# Altium PCB PCB264.PcbDoc
Units mm, origin at the board's own origin, x right, y up, seen from the top; angles counter-clockwise.
Board outline 152.4 x 101.6 mm, 2 copper layers (Top Layer, Bottom Layer); 89 components, 89 nets, 425 pads, 53 vias.
Unrouted connection lines stored in the file: 221.
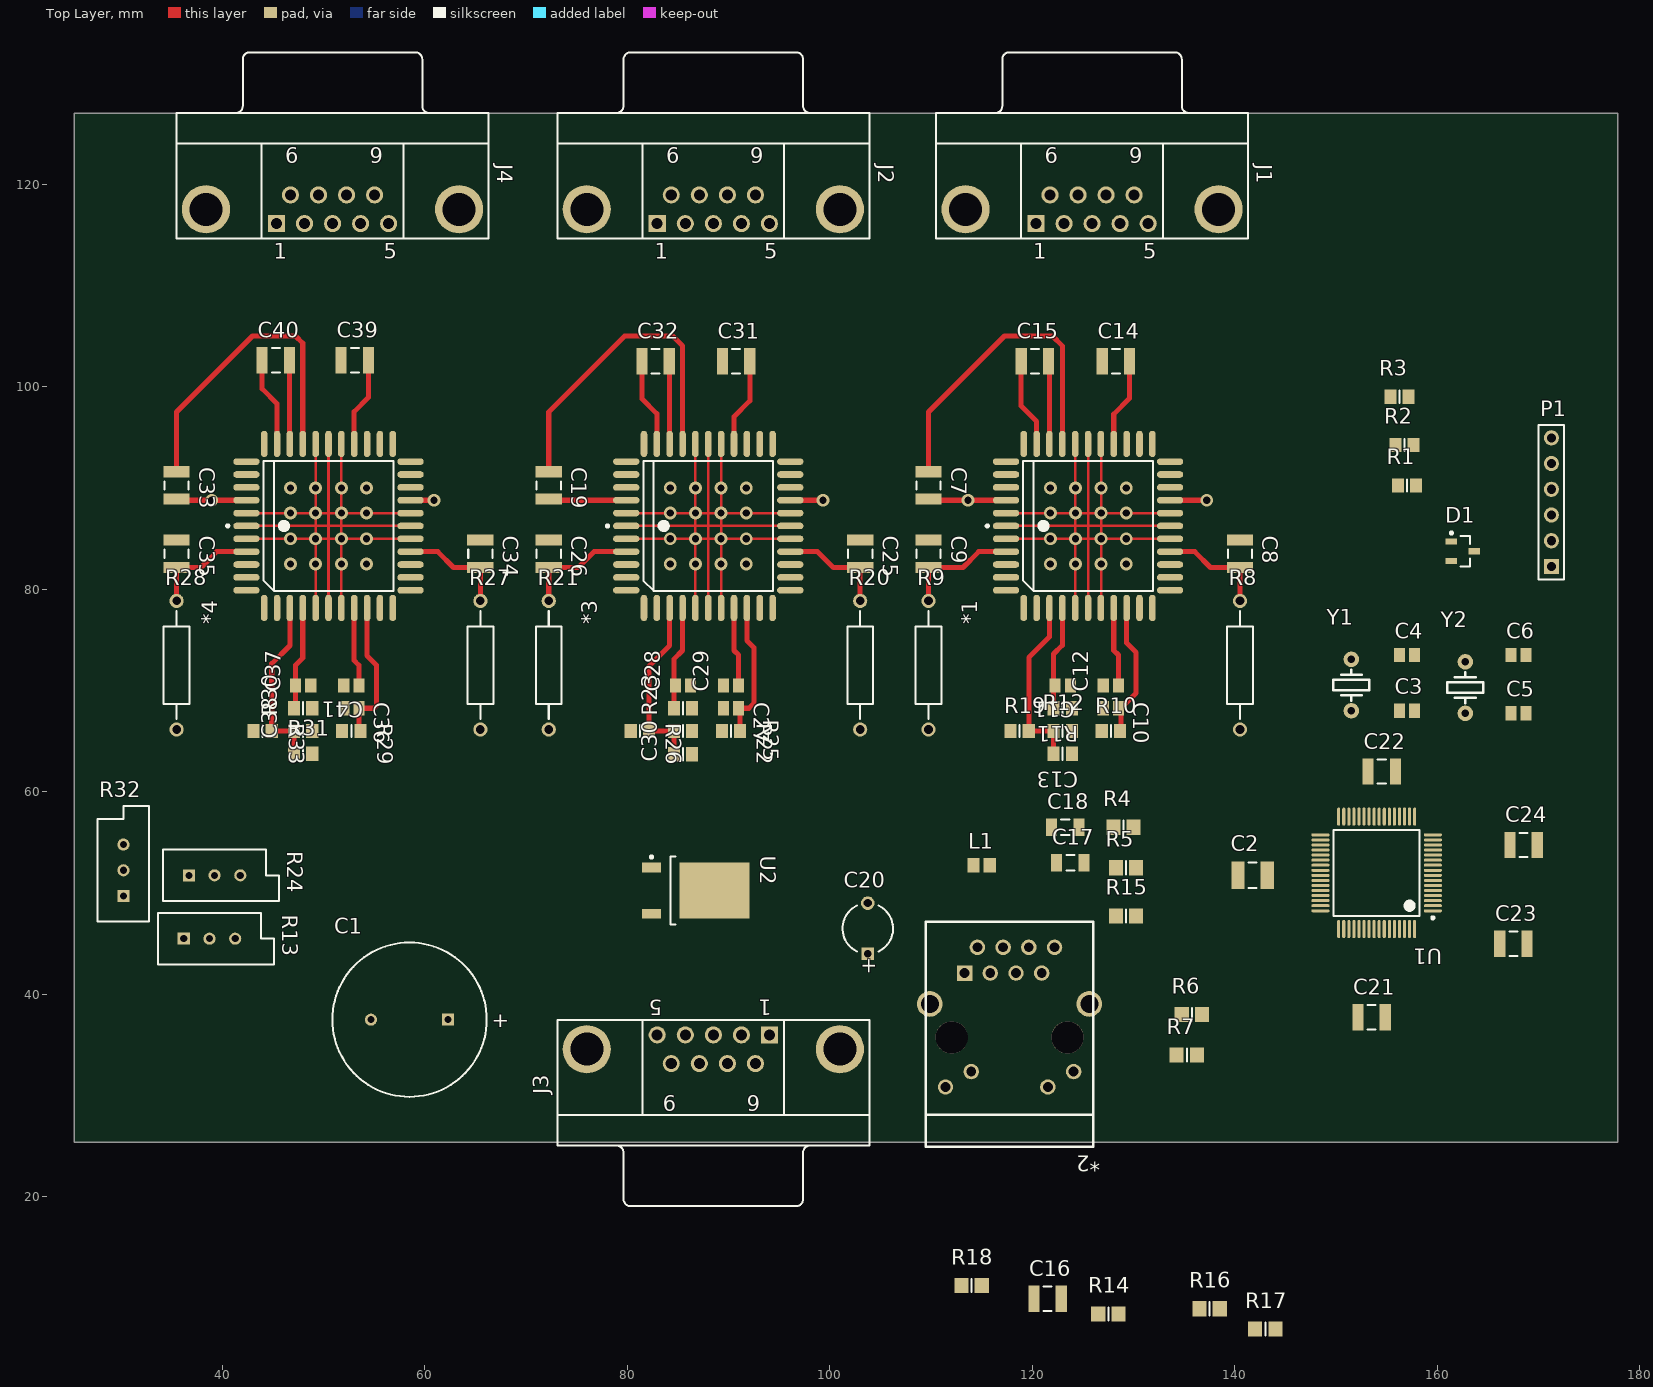
[diagram p0: Top Layer view]
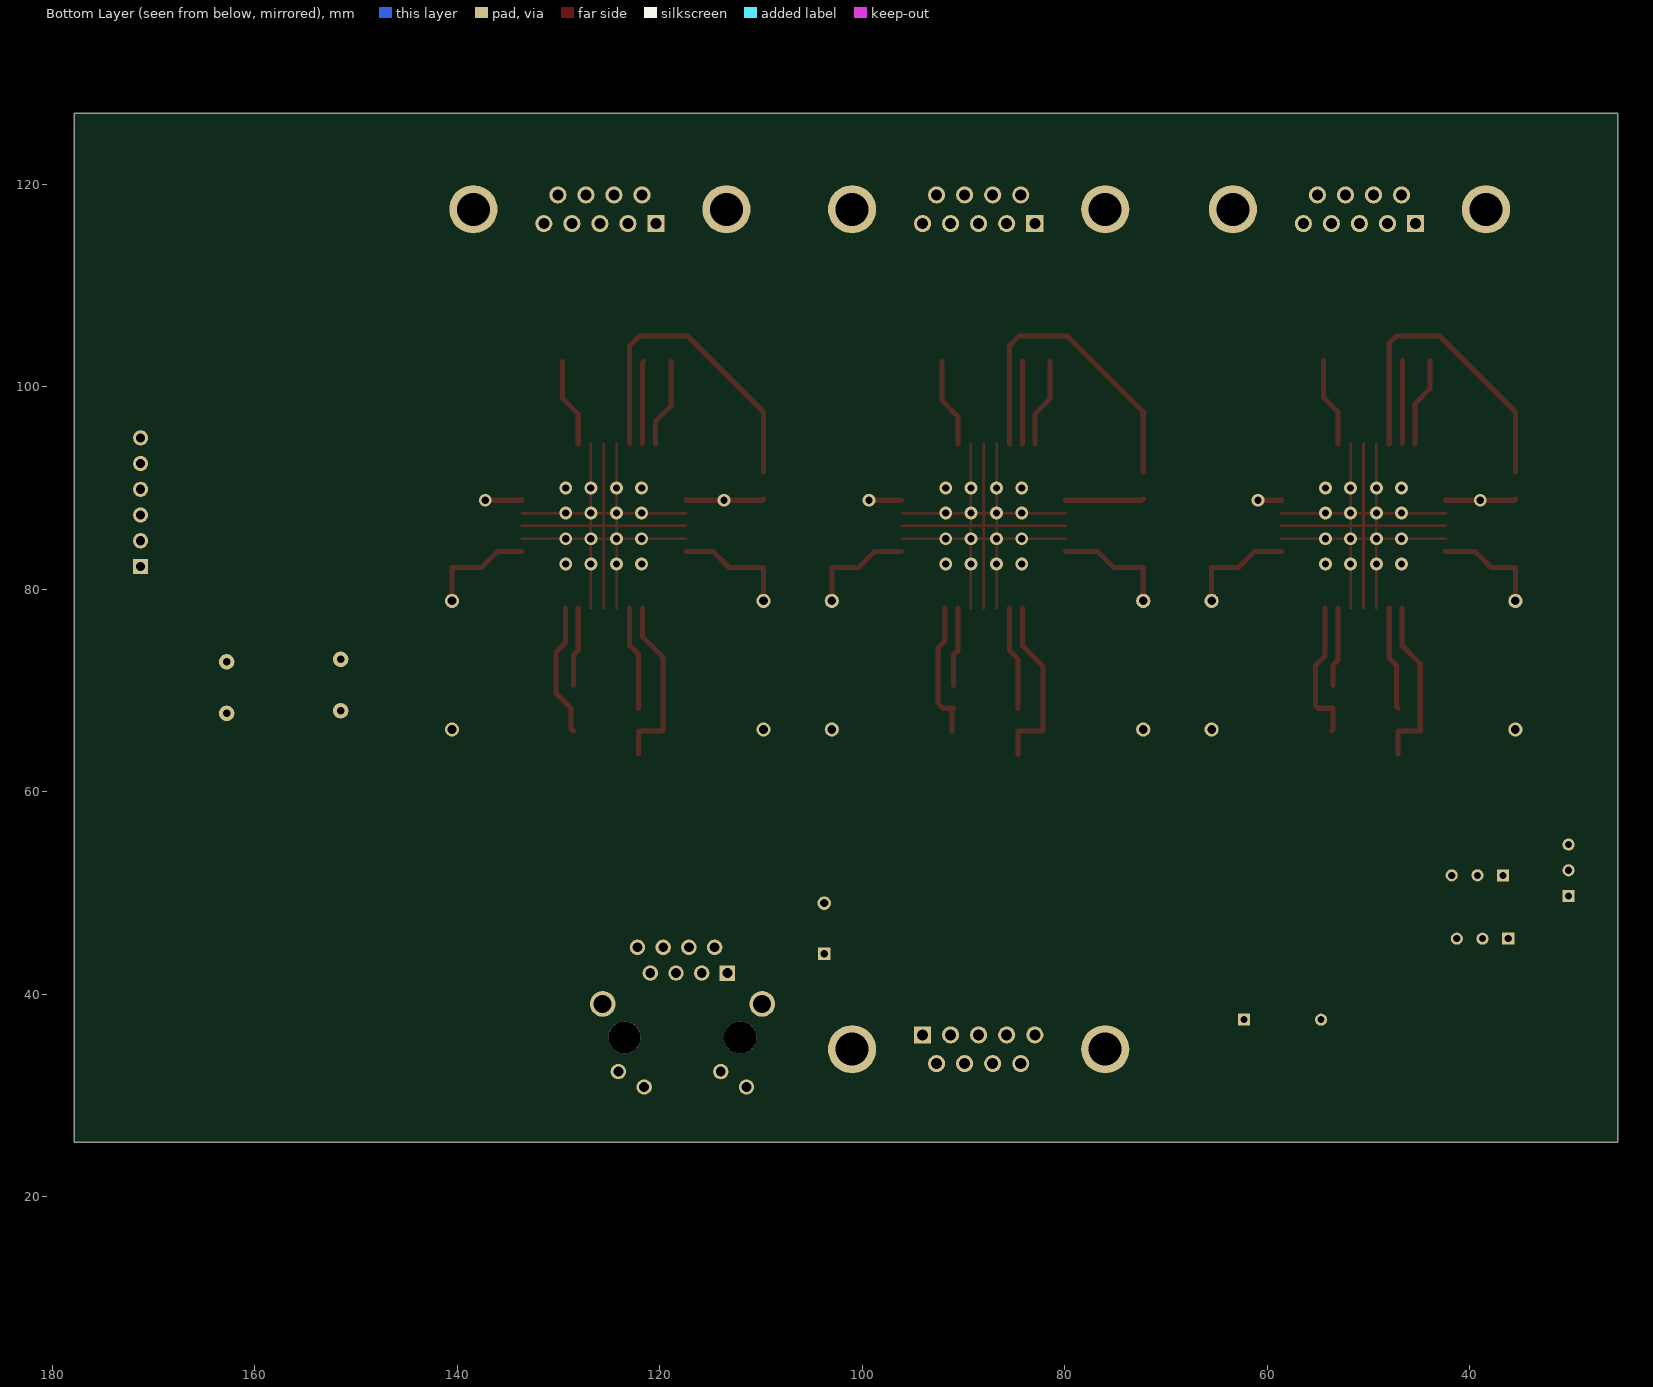
[diagram p1: Bottom Layer view, seen from below]

## Layer stack, top to bottom
Top Layer: signal copper 0.0356
Dielectric: dielectric 0.32, FR-4, Dk 4.8
Bottom Layer: signal copper 0.0356

## Board outline
25.4,25.4 177.8,25.4 177.8,127 25.4,127

## Design rules (kind name [scope] priority, off if disabled: settings)
Clearance [All] p1: gap=0.127
PolygonConnect [All] p1: connectstyle=Relief reliefconductorwidth=0.254 reliefentries=4 polygonreliefangle="90 Angle"
RoomDefinition Sheet1 [InComponentClass('Sheet1')] p1: confinementstyle=ConfineOut formatcopy=TRUE lockcomponents=FALSE outline 179,24.5 230,24.5 230,42 179,42
RoutingVias [All] p1: holewidth=0.711 width=1.27 viastyle="Through Hole" minholewidth=0.711 minwidth=1.27 maxholewidth=0.711 maxwidth=1.27
SilkscreenOverComponentPads [All] p1: minsilkscreentomaskgap=0.254
SolderMaskExpansion [All] p1: expansion=0.102
Width [All] p1: maxlimit=2.54 minlimit=0.254 preferedwidth=0.254
27 further rules are at their usual default settings.

## Components (designator, comment, footprint, x,y, rotation, side; value= is the part's Value field where it differs from the comment)
*1 "Component_1" PLCC-44AM 125.5,86.25 r90 top
*2 "LU1T516-43" EthernetCON 117.75,35.75 r270 top
*3 "Component_1" PLCC-44AM 88,86.25 r90 top
*4 "Component_1" PLCC-44AM 50.5,86.25 r90 top
C1 "Cap Pol1" RB7.6-15 58.5,37.5 r0 top
C2 "Cap" CAPC3225N 141.75,51.75 r0 top
C3 "Cap" CAPC2012L 157,68 r0 top
C4 "Cap" CAPC2012L 157,73.5 r0 top
C5 "Cap" CAPC2012L 168,67.75 r0 top
C6 "Cap" CAPC2012L 168,73.5 r0 top
C7 "Cap" RESC3225L 109.75,90.25 r270 top
C8 "Cap" RESC3225L 140.5,83.5 r270 top
C9 "Cap" RESC3225L 109.75,83.5 r270 top
C10 "Cap" CAPC2012L 127.75,68.25 r0 top
C11 "Cap" CAPC2012L 123,70.5 r180 top
C12 "Cap" CAPC2012L 127.75,70.5 r180 top
C13 "Cap" RESC2012N 123,63.75 r180 top
C14 "Cap" RESC3225L 128.25,102.5 r0 top
C15 "Cap" RESC3225L 120.25,102.5 r0 top
C16 "Cap" CAPC3225L 121.5,9.95 r0 top
C17 "Cap" CAPC3216L 123.75,53 r0 top
C18 "Cap" CAPC3216L 123.25,56.5 r0 top
C19 "Cap" RESC3225L 72.25,90.25 r270 top
C20 "Cap Pol1" CAPPR5-5x5 103.75,46.5 r90 top
C21 "Cap" CAPC3225L 153.5,37.75 r0 top
C22 "Cap" CAPC3225L 154.5,62 r0 top
C23 "Cap" CAPC3225L 167.5,45 r0 top
C24 "Cap" CAPC3225L 168.5,54.75 r0 top
C25 "Cap" RESC3225L 103,83.5 r270 top
C26 "Cap" RESC3225L 72.25,83.5 r270 top
C27 "Cap" CAPC2012L 90.25,68.25 r0 top
C28 "Cap" CAPC2012L 85.5,70.5 r180 top
C29 "Cap" CAPC2012L 90.25,70.5 r180 top
C30 "Cap" RESC2012N 85.5,63.7 r180 top
C31 "Cap" RESC3225L 90.75,102.5 r0 top
C32 "Cap" RESC3225L 82.8,102.5 r0 top
C33 "Cap" RESC3225L 35.5,90.25 r270 top
C34 "Cap" RESC3225L 65.5,83.5 r270 top
C35 "Cap" RESC3225L 35.5,83.5 r270 top
C36 "Cap" CAPC2012L 52.75,68.25 r0 top
C37 "Cap" CAPC2012L 48,70.5 r180 top
C38 "Cap" RESC2012N 48,66 r180 top
C39 "Cap" RESC3225L 53.1,102.6 r0 top
C40 "Cap" RESC3225L 45.3,102.6 r0 top
C41 "Cap" CAPC2012L 52.75,70.5 r180 top
D1 "Diode" SOT95P240-3N 162.5,83.75 r0 top
J1 "D Connector 9" D-SUB-9 125.9,116.1 r0 top
J2 "D Connector 9" D-SUB-9 88.5,116.1 r0 top
J3 "D Connector 9" D-SUB-9 88.5,36 r180 top
J4 "D Connector 9" D-SUB-9 50.9,116.1 r0 top
L1 "Inductor" INDC2012L 115,52.75 r0 top
P1 "Программатор" HDR1X6 171.25,82.25 r90 top
R1 "Res2" RESC2012N 157,90.25 r0 top
R2 "Res2" RESC2012N 156.75,94.25 r0 top
R3 "Res2" RESC2012N 156.25,99 r0 top
R4 "Res2" RESC2012M 129,56.5 r0 top
R5 "Res2" RESC2012M 129.25,52.5 r0 top
R6 "Res2" RESC2012M 135.75,38 r0 top
R7 "Res2" RESC2012M 135.25,34 r0 top
R8 "Res2" AXIAL-0.5 140.5,72.5 r90 top
R9 "Res2" AXIAL-0.5 109.75,72.5 r90 top
R10 "Res2" RESC2012N 127.75,66 r0 top
R11 "Res2" RESC2012N 123,68.25 r180 top
R12 "Res2" RESC2012N 123,66 r0 top
R13 "RPot" VR5 38.75,45.5 r0 top
R14 "Res2" RESC2012M 127.5,8.45 r0 top
R15 "Res2" RESC2012M 129.25,47.75 r0 top
R16 "Res2" RESC2012M 137.5,8.95 r0 top
R17 "Res2" RESC2012M 143,6.95 r0 top
R18 "Res2" RESC2012M 114,11.25 r0 top
R19 "Res2" RESC2012N 118.75,66 r0 top
R20 "Res2" AXIAL-0.5 103,72.5 r90 top
R21 "Res2" AXIAL-0.5 72.25,72.5 r90 top
R22 "Res2" RESC2012N 90.25,66 r0 top
R23 "Res2" RESC2012N 85.5,68.25 r180 top
R24 "RPot" VR5 39.25,51.75 r0 top
R25 "Res2" RESC2012N 85.5,66 r0 top
R26 "Res2" RESC2012N 81.25,66 r0 top
R27 "Res2" AXIAL-0.5 65.5,72.5 r90 top
R28 "Res2" AXIAL-0.5 35.5,72.5 r90 top
R29 "Res2" RESC2012N 52.75,66 r0 top
R30 "Res2" RESC2012N 48,68.25 r180 top
R31 "Res2" RESC2012N 48,63.75 r0 top
R32 "RPot" VR5 30.25,52.25 r90 top
R33 "Res2" RESC2012N 44,66 r0 top
U1 "PIC18F67J60T-I/PT" TQFP-PT64_N 154,52 r180 top
U2 "LM1117DT-3.3" TD03B_N 86.75,50.25 r0 top
Y1 "XTAL" Quartz 151.5,68 r90 top
Y2 "XTAL" Quartz 162.75,67.75 r90 top

## Footprints (in the part's own frame and the unit in brackets; to place one, negate y for a bottom-side part, rotate by r counter-clockwise, add the part's x,y. Pads: shape width x height; smd on the part's side, far side on the other; paste and mask are expansions set on the pad)
AXIAL-0.5 [mm] "Axial Device, Thru-Hole; 2 Leads; 0.5 in Pin Spacing"
  round 1.4 hole 0.85: 1(-6.35,0) 2(6.35,0)
  silkscreen extent -5.33,-1.27 5.33,1.27
CAPC2012L [mm] "Chip Capacitor, Body 2.0x1.3mm, IPC High Density"
  rect 1.1x1.4 smd: 1(-0.75,0) 2(0.75,0)
  body extent -1.1,-0.72 1.1,0.72, height 1.4
CAPC3216L [mm] "Chip Capacitor, Body 3.2x1.6mm, IPC High Density"
  rect 1.1x1.7 smd: 1(-1.35,0) 2(1.35,0)
  silkscreen extent -0.4,-0.75 0.4,0.75, body extent -1.7,-0.9 1.7,0.9, height 1.3
CAPC3225L [mm] "Chip Capacitor, Body 3.2x2.5mm, IPC High Density"
  rect 1.1x2.6 smd: 1(-1.35,0) 2(1.35,0)
  silkscreen extent -0.4,-1.2 0.4,1.2, body extent -1.7,-1.35 1.7,1.35, height 1.5
CAPC3225N [mm] "Chip Capacitor, Body 3.2x2.5mm, IPC Medium Density"
  rect 1.3x2.7 smd: 1(-1.45,0) 2(1.45,0)
  silkscreen extent -0.4,-1.25 0.4,1.25, body extent -1.7,-1.35 1.7,1.35, height 1.5
CAPPR5-5x5 [mm] "Capacitor, Electrolytic, Radial; Body 5 x 5 mm (Dia.xH typ); Pin Spacing 5 mm (typ)"
  rect 1.25x1.25 hole 0.75: 1(-2.5,0)
  round 1.35 hole 0.8: 2(2.5,0)
  silkscreen extent -2.26,-2.5 2.27,2.5
D-SUB-9 [mm] "Connector"
  rect 1.69x1.69 hole 1.09: 1(-5.54,0)
  round 1.69 hole 1.09: 2(-2.77,0) 3(0,0) 4(2.77,0) 5(5.54,0) 6(-4.155,2.84) 7(-1.385,2.84) 8(1.385,2.84) 9(4.155,2.84)
  round 4.76 hole 3.26: 10(-12.495,1.42) 11(12.495,1.42)
  silkscreen extent -15.4,-1.48 15.4,16.92, body extent -15.49,-1.52 15.49,17.02, height 6.35
EthernetCON [mil] "Ethernet connector w/two LEDs"
  rect 60x60 hole 38: 1(-250,-175)
  round 60 hole 38: 2(-350,-125) 3(-250,-75) 4(-350,-25) 5(-250,25) 6(-350,75) 7(-250,125) 8(-350,175) 9(193,-249) 10(133,-149) 11(193,149) 12(133,249)
  round 100 hole 70: 13(-130,-310) 14(-130,310)
  round 125 hole 125 unplated: 15(0,-225) 16(0,225)
  silkscreen extent -450,-325 425,325, body extent -450,-325 425,325, height 550
HDR1X6 [mm] "Connector; Header; 6 Position"
  rect 1.5x1.5 hole 0.9: 1(0,0)
  round 1.5 hole 0.9: 2(2.54,0) 3(5.08,0) 4(7.62,0) 5(10.16,0) 6(12.7,0)
  silkscreen extent -1.27,-1.27 13.97,1.27
INDC2012L [mm] "Chip Inductor, Body 2.0x1.2mm, IPC High Density"
  rect 1.2x1.4 smd: 1(-0.8,0) 2(0.8,0)
  body extent -1.1,-0.7 1.1,0.7, height 0.55
PLCC-44AM [mm] "Leaded Chip Carrier, 44-Leads, Body 16.6x16.6mm, Pitch 1.27mm, IPC Low Density"
  oval 0.65x2.6 smd: 1(0,8.1) 2(-1.27,8.1) 3(-2.54,8.1) 4(-3.81,8.1) 5(-5.08,8.1) 6(-6.35,8.1) 18(-6.35,-8.1) 19(-5.08,-8.1) 20(-3.81,-8.1) 21(-2.54,-8.1) 22(-1.27,-8.1) 23(0,-8.1) 24(1.27,-8.1) 25(2.54,-8.1) 26(3.81,-8.1) 27(5.08,-8.1) 28(6.35,-8.1) 40(6.35,8.1) 41(5.08,8.1) 42(3.81,8.1) 43(2.54,8.1) 44(1.27,8.1)
  oval 2.6x0.65 smd: 7(-8.1,6.35) 8(-8.1,5.08) 9(-8.1,3.81) 10(-8.1,2.54) 11(-8.1,1.27) 12(-8.1,0) 13(-8.1,-1.27) 14(-8.1,-2.54) 15(-8.1,-3.81) 16(-8.1,-5.08) 17(-8.1,-6.35) 29(8.1,-6.35) 30(8.1,-5.08) 31(8.1,-3.81) 32(8.1,-2.54) 33(8.1,-1.27) 34(8.1,0) 35(8.1,1.27) 36(8.1,2.54) 37(8.1,3.81) 38(8.1,5.08) 39(8.1,6.35)
  silkscreen extent -6.4,-6.4 6.4,10.07, body extent -8.33,-8.33 8.33,8.33, height 4.57
Quartz [mil]
  round 60 hole 30: 1(0,0) 2(200,0)
  silkscreen extent 40,-70 160,70, body extent -100,-100 300,100, height 90
RB7.6-15 [mm] "Polarized Capacitor (Radial); 2 Leads"
  rect 1.2x1.2 hole 0.7: 1(3.81,0)
  round 1.2 hole 0.7: 2(-3.81,0)
  silkscreen extent -7.62,-7.62 7.62,7.62
RESC2012M [mm] "Chip Resistor, Body 2.0x1.2mm, IPC Low Density"
  rect 1.4x1.5 smd: 1(-1,0) 2(1,0)
  silkscreen extent 0,-0.65 0,0.65, body extent -1.07,-0.7 1.07,0.7, height 0.7
RESC2012N [mm] "Chip Resistor, Body 2.0x1.2mm, IPC Medium Density"
  rect 1.2x1.4 smd: 1(-0.9,0) 2(0.9,0)
  silkscreen extent 0,-0.6 0,0.6, body extent -1.07,-0.7 1.07,0.7, height 0.7
RESC3225L [mm] "Chip Resistor, Body 3.2x2.5mm, IPC High Density"
  rect 1.1x2.6 smd: 1(-1.35,0) 2(1.35,0)
  silkscreen extent -0.4,-1.2 0.4,1.2, body extent -1.68,-1.32 1.68,1.32, height 0.9
SOT95P240-3N [mm] "SOT23, 3-Leads, Body 2.9x1.3mm, Pitch 0.95mm, Lead Span 2.4mm, IPC Medium Density"
  rect 1.15x0.6 smd: 1(-1.125,0.95) 2(-1.125,-0.95) 3(1.125,0)
  silkscreen extent -1.25,-1.5 0.7,1.92, body extent -0.7,-1.5 0.7,1.5, height 1.14
TD03B_N [mm] "D-PAK, 4-Leads, Body 6.1x6.6mm, Pitch 2.29mm, Lead Span 9.7mm, IPC Medium Density"
  rect 1.9x0.95 smd: 1(-4.35,2.28) 3(-4.35,-2.28)
  rect 6.9x5.5 smd: 4(1.85,0)
  silkscreen extent -4.47,-3.35 -2,3.43, body extent -2.5,-3.35 3.7,3.35, height 2.38
TQFP-PT64_N [mm] "Thin QFP, 64-Leads, Body 10x10mm, Pitch 0.5mm, IPC Medium Density"
  oval 1.8x0.3 smd: 1(-5.55,3.75) 2(-5.55,3.25) 3(-5.55,2.75) 4(-5.55,2.25) 5(-5.55,1.75) 6(-5.55,1.25) 7(-5.55,0.75) 8(-5.55,0.25) 9(-5.55,-0.25) 10(-5.55,-0.75) 11(-5.55,-1.25) 12(-5.55,-1.75) 13(-5.55,-2.25) 14(-5.55,-2.75) 15(-5.55,-3.25) 16(-5.55,-3.75) 33(5.55,-3.75) 34(5.55,-3.25) 35(5.55,-2.75) 36(5.55,-2.25) 37(5.55,-1.75) 38(5.55,-1.25) 39(5.55,-0.75) 40(5.55,-0.25) 41(5.55,0.25) 42(5.55,0.75) 43(5.55,1.25) 44(5.55,1.75) 45(5.55,2.25) 46(5.55,2.75) 47(5.55,3.25) 48(5.55,3.75)
  oval 0.3x1.8 smd: 17(-3.75,-5.55) 18(-3.25,-5.55) 19(-2.75,-5.55) 20(-2.25,-5.55) 21(-1.75,-5.55) 22(-1.25,-5.55) 23(-0.75,-5.55) 24(-0.25,-5.55) 25(0.25,-5.55) 26(0.75,-5.55) 27(1.25,-5.55) 28(1.75,-5.55) 29(2.25,-5.55) 30(2.75,-5.55) 31(3.25,-5.55) 32(3.75,-5.55) 49(3.75,5.55) 50(3.25,5.55) 51(2.75,5.55) 52(2.25,5.55) 53(1.75,5.55) 54(1.25,5.55) 55(0.75,5.55) 56(0.25,5.55) 57(-0.25,5.55) 58(-0.75,5.55) 59(-1.25,5.55) 60(-1.75,5.55) 61(-2.25,5.55) 62(-2.75,5.55) 63(-3.25,5.55) 64(-3.75,5.55)
  silkscreen extent -5.68,-4.25 4.25,4.57, body extent -5,-5 5,5, height 1.2
VR5 [mm] "Variable Resistor, Thru-Hole; 3 Leads"
  rect 1.2x1.2 hole 0.7: 1(-2.54,0)
  round 1.2 hole 0.7: 2(0,0) 3(2.54,0)
  silkscreen extent -5.08,-2.54 6.35,2.54

## Part data
C1 C20: "Polarized Capacitor (Radial)"
C2 C3 C4 C5 C6 C7 C8 C9 C10 C11 C12 C13 C14 C15 C16 C17 C18 C19 C21 C22 C23 C24 C25 C26 C27 C28 C29 C30 C31 C32 C33 C34 C35 C36 C37 C38 C39 C40 C41: "Capacitor"
D1: "Default Diode"
J1 J2 J3 J4: "Receptacle Assembly, 9 Position, Right Angle"
P1: library part "Header 6", "Header, 6-Pin"
R1 R2 R3 R4 R5 R6 R7 R8 R9 R10 R11 R12 R14 R15 R16 R17 R18 R19 R20 R21 R22 R23 R25 R26 R27 R28 R29 R30 R31 R33: "Resistor"
R13 R24 R32: "Potentiometer"
U1: "High Performance, 1-Mbit Flash Microcontroller with Ethernet, 128K Flash, 64-Pin TQFP, Industrial Temperature Range, Tape and Reel"
U2: "800mA Low-Dropout Linear Regulator"
Y1 Y2: "Crystal Oscillator"

## Via types
v1: diameter 1.27, hole 0.711, Top Layer to Bottom Layer, 53 vias

## Nets (pads, with @x,y where several pads share a name; then routed paths per layer and width w, separated by ;. In a path a pad name is that pad's centre, name@x,y a point inside that pad or via, vN(x,y) a via of type N, cw(c..) or ccw(c..) an arc to the next point about the centre after c; other vN are vias at no path point)
+5: J3.5 U2.3
+30: *1.25 *1.43 *3.25 *3.43 *4.25 *4.43 C1.1 C7.2 C19.2 C33.2 J3.1 J3.2 J3.3 J3.4 | length 31.5
  Top Layer w0.5: C33.2 35.61,88.79 *4.43 ; *4.25 v1(60.915,88.79) ; C19.2 72.36,88.79 *3.43 ; *3.25 v1(99.325,88.79) ; C7.2 109.86,88.79 v1(113.65,88.79) *1.43 ; *1.25 v1(137.215,88.79)
  other v1: 38.975,88.79
GND: *1.1 *1.2 *1.11 *1.12 *1.13 *1.22 *1.23 *1.24 *1.26 *1.33 *1.34 *1.35 *1.41 *1.44 *2.10 *2.11 *2.13 *2.14 *3.1 *3.2 *3.11 *3.12 *3.13 *3.22 *3.23 *3.24 *3.26 *3.33 *3.34 *3.35 *3.41 *3.44 *4.1 *4.2 *4.11 *4.12 *4.13 *4.22 *4.23 *4.24 *4.26 *4.33 *4.34 *4.35 *4.41 *4.44 C1.2 C2.1 C3.2 C4.1 C5.2 C6.1 C8.1 C9.1 C10.1 C11.1 C12.2 C13.1 C14.1 C16.2 C17.1 C18.1 C20.2 C21.2 C22.2 C23.2 C24.2 C25.1 C26.1 C27.1 C28.1 C29.2 C30.1 C31.1 C34.1 C35.1 C36.1 C37.1 C38.1 C39.1 C41.2 J1.5 J1.10 J1.11 J2.5 J2.10 J2.11 J3.6 J3.7 J3.8 J3.9 J3.10 J3.11 J4.5 J4.10 J4.11 P1.3 R8.1 R9.1 R10.1 R11.1 R12.2 R13.1 R18.1 R20.1 R21.1 R22.1 R23.1 R24.1 R25.2 R27.1 R28.1 R29.1 R30.1 R31.2 R32.1 U1.9 U1.20 U1.25 U1.41 U1.45 U1.52 U1.55 U1.56 U2.1 | length 291.6
  Top Layer w0.254: *4.2 v1(49.23,84.98) ; *4.1 49.23,86.25 ; *4.44 v1(49.23,87.52) ; *4.11 v1(49.23,84.98) ; *4.35 v1(49.23,87.52) ; *4.12 50.5,84.98 ; *4.34 50.5,87.52 ; *4.13 v1(51.77,84.98) ; *4.33 v1(51.77,87.52) ; *4.22 v1(51.77,84.98) ; *4.23 51.77,86.25 ; *4.24 v1(51.77,87.52) ; *3.2 v1(86.73,84.98) ; *3.1 86.73,86.25 ; *3.44 v1(86.73,87.52) ; *3.11 v1(86.73,84.98) ; *3.35 v1(86.73,87.52) ; *3.12 88,84.98 ; *3.34 88,87.52 ; *3.13 v1(89.27,84.98) ; *3.33 v1(89.27,87.52) ; *3.22 v1(89.27,84.98) ; *3.23 89.27,86.25 ; *3.24 v1(89.27,87.52) ; *1.2@117.425,84.98 v1(124.255,84.98) ; *1.1@117.425,86.25 124.255,86.25 ; *1.44@117.425,87.52 v1(124.255,87.52) ; *1.11@124.255,78.15 v1(124.255,84.98) ; *1.35@124.255,94.35 v1(124.255,87.52) ; *1.12@125.525,78.15 125.525,84.98 ; *1.34@125.525,94.35 125.525,87.52 ; *1.13@126.795,78.15 v1(126.795,84.98) ; *1.33@126.795,94.35 v1(126.795,87.52) ; *1.22@133.625,84.98 v1(126.795,84.98) ; *1.23@133.625,86.25 126.795,86.25 ; *1.24@133.625,87.52 v1(126.795,87.52) ; v1(49.23,84.98) 50.5,84.98 ; v1(49.23,84.98) 49.23,86.25 ; 49.23,86.25 50.5,86.25 ; 49.23,86.25 v1(49.23,87.52) ; v1(49.23,87.52) 50.5,87.52 ; 50.5,84.98 v1(51.77,84.98) ; 50.5,84.98 50.5,86.25 ; 50.5,86.25 51.77,86.25 ; 50.5,86.25 50.5,87.52 ; 50.5,87.52 v1(51.77,87.52) ; v1(51.77,84.98) 51.77,86.25 ; 51.77,86.25 v1(51.77,87.52) ; v1(86.73,84.98) 88,84.98 ; v1(86.73,84.98) 86.73,86.25 ; 86.73,86.25 v1(86.73,87.52) ; 86.73,86.25 88,86.25 ; v1(86.73,87.52) 88,87.52 ; 88,84.98 88,86.25 ; 88,84.98 v1(89.27,84.98) ; 88,86.25 88,87.52 ; 88,86.25 89.27,86.25 ; 88,87.52 v1(89.27,87.52) ; v1(89.27,84.98) 89.27,86.25 ; 89.27,86.25 v1(89.27,87.52) ; v1(124.255,84.98) 124.255,86.25 ; v1(124.255,84.98) 125.525,84.98 ; 124.255,86.25 125.525,86.25 ; 124.255,86.25 v1(124.255,87.52) ; v1(124.255,87.52) 125.525,87.52 ; 125.525,84.98 v1(126.795,84.98) ; 125.525,84.98 125.525,86.25 ; 125.525,86.25 126.795,86.25 ; 125.525,86.25 125.525,87.52 ; 125.525,87.52 v1(126.795,87.52) ; v1(126.795,84.98) 126.795,86.25 ; 126.795,86.25 v1(126.795,87.52)
  other v1: 46.75,82.5 49.23,82.5 51.77,82.5 54.25,82.5 84.25,82.5 86.73,82.5 89.27,82.5 91.75,82.5 121.775,82.5 124.255,82.5 126.795,82.5 129.275,82.5 46.75,84.98 54.25,84.98 84.25,84.98 91.75,84.98 121.775,84.98 129.275,84.98 46.75,87.52 54.25,87.52 84.25,87.52 91.75,87.52 121.775,87.52 129.275,87.52 46.75,90 49.23,90 51.77,90 54.25,90 84.25,90 86.73,90 89.27,90 91.75,90 121.775,90 124.255,90 126.795,90 129.275,90
Net*1_3: *1.3 C9.2 R9.2 | length 11.6
  Top Layer w0.5: R9.2 C9.2 113.15,82.15 114.71,83.71 *1.3
Net*1_4: *1.4 U1.4
Net*1_5: *1.5 U1.2
Net*1_6: *1.6 J1.1
Net*1_9: *1.9 C13.2 R12.1 R19.2 | length 17.7
  Top Layer w0.5: *1.9 121.69,75.31 119.65,73.27 R19.2 R12.1 C13.2
Net*1_10: *1.10 C11.2 R11.2 | length 10.3
  Top Layer w0.5: R11.2 122.1,73.6 122.96,74.46 *1.10
Net*1_14: *1.14 C12.1 R13.3 | length 7.8
  Top Layer w0.5: *1.14 128.04,73.96 128.5,73.5 C12.1
Net*1_15: *1.15 C10.2 R10.2 | length 13.3
  Top Layer w0.5: R10.2@128.5,66 128.75,66.25 128.75,68.25 130.25,69.75 130.25,73.75 129.31,74.69 *1.15
Net*1_18: *1.18 J1.4
Net*1_19: *1.19 U1.64
Net*1_20: *1.20 U1.1
Net*1_21: *1.21 C8.2 R8.2 | length 10.8
  Top Layer w0.5: *1.21 136.04,83.71 137.6,82.15 C8.2 R8.2
Net*1_27: *1.27 *3.27 *4.27 U1.32
Net*1_28: *1.28 J1.3
Net*1_31: *1.31 U1.33
Net*1_32: *1.32 C14.2 | length 8.8
  Top Layer w0.5: *1.32 128.04,97.29 129.6,98.85 C14.2
Net*1_36: *1.36 C7.1 | length 32.3
  Top Layer w0.5: C7.1 109.75,97.5 117.25,105 122,105 122.96,104.04 *1.36
Net*1_37: *1.37 C15.2 | length 8.2
  Top Layer w0.5: C15.2 121.69,102.41 *1.37
Net*1_38: *1.38 C15.1 | length 8.8
  Top Layer w0.5: C15.1 118.9,98.1 120.42,96.58 *1.38
Net*1_40: *1.40 J1.2
Net*1_42: *1.42 *3.42 *4.42 U1.31
Net*2_1: *2.1 R17.2 U1.51
Net*2_2: *2.2 R16.2 U1.50
Net*2_3: *2.3 C18.2 L1.2 R16.1 R17.1
Net*2_6: *2.6 C17.2 R14.1 R15.1
Net*2_7: *2.7 R14.2 U1.46
Net*2_8: *2.8 R15.2 U1.47
Net*2_9: *2.9 R7.2
Net*2_12: *2.12 R6.2
Net*3_3: *3.3 C26.2 R21.2 | length 11.6
  Top Layer w0.5: R21.2 C26.2 75.15,82.15 76.71,83.71 *3.3
Net*3_4: *3.4 U1.5
Net*3_5: *3.5 U1.63
Net*3_6: *3.6 J2.1
Net*3_9: *3.9 C30.2 R25.1 R26.2 | length 17.7
  Top Layer w0.5: *3.9 84.19,74.44 82.15,72.4 R26.2 R25.1 C30.2
Net*3_10: *3.10 C28.2 R23.2 | length 10.3
  Top Layer w0.5: R23.2 84.6,73.1 85.46,73.96 *3.10
Net*3_14: *3.14 C29.1 R24.3 | length 7.8
  Top Layer w0.5: *3.14 90.54,73.96 91,73.5 C29.1
Net*3_15: *3.15 C27.2 R22.2 | length 13.7
  Top Layer w0.5: R22.2 91.15,68.1 C27.2 92,68.25 92.5,68.75 92.5,74.25 91.81,74.94 *3.15
Net*3_18: *3.18 J2.4
Net*3_19: *3.19 U1.61
Net*3_20: *3.20 U1.62
Net*3_21: *3.21 C25.2 R20.2 | length 10.8
  Top Layer w0.5: *3.21 98.79,83.71 100.35,82.15 C25.2 R20.2
Net*3_28: *3.28 J2.3
Net*3_31: *3.31 U1.59
Net*3_32: *3.32 C31.2 | length 8.8
  Top Layer w0.5: *3.32 90.54,97.04 92.1,98.6 C31.2
Net*3_36: *3.36 C19.1 | length 32.3
  Top Layer w0.5: C19.1 72.25,97.5 79.75,105 84.5,105 85.46,104.04 *3.36
Net*3_37: *3.37 C32.2 | length 8.2
  Top Layer w0.5: C32.2 84.19,102.46 *3.37
Net*3_38: *3.38 C32.1 | length 8.8
  Top Layer w0.5: C32.1 81.45,98.8 82.92,97.33 *3.38
Net*3_40: *3.40 J2.2
Net*4_3: *4.3 C35.2 R28.2 | length 10.8
  Top Layer w0.5: R28.2 C35.2 37.9,82.15 39.46,83.71 *4.3
Net*4_4: *4.4 U1.6
Net*4_5: *4.5 U1.17
Net*4_6: *4.6 J4.1
Net*4_9: *4.9 C38.2 R31.1 R33.2 | length 17.3
  Top Layer w0.5: *4.9 46.69,74.44 44.9,72.65 R33.2 C38.2 R31.1
Net*4_10: *4.10 C37.2 R30.2 | length 10.3
  Top Layer w0.5: R30.2 47.25,68.4 C37.2 47.25,72.5 47.96,73.21 *4.10
Net*4_14: *4.14 C41.1 R32.3 | length 7.8
  Top Layer w0.5: *4.14 53.04,72.96 53.5,72.5 C41.1
Net*4_15: *4.15 C36.2 R29.2 | length 14.2
  Top Layer w0.5: R29.2 53.5,66.15 C36.2 55,68.25 55.25,68.5 55.25,72.5 54.31,73.44 *4.15
Net*4_18: *4.18 J4.4
Net*4_19: *4.19 U1.15
Net*4_20: *4.20 U1.16
Net*4_21: *4.21 C34.2 R27.2 | length 10.8
  Top Layer w0.5: *4.21 61.29,83.71 62.85,82.15 C34.2 R27.2
Net*4_28: *4.28 J4.3
Net*4_31: *4.31 U1.60
Net*4_32: *4.32 C39.2 | length 8.8
  Top Layer w0.5: *4.32 53.04,97.54 54.45,98.95 C39.2
Net*4_36: *4.36 C33.1 | length 31.7
  Top Layer w0.5: C33.1 35.5,97.5 43,105 47.25,105 47.96,104.29 *4.36
Net*4_37: *4.37 C40.2 | length 8.2
  Top Layer w0.5: *4.37@46.65,94.39 C40.2
Net*4_38: *4.38 C40.1 | length 8.9
  Top Layer w0.5: C40.1 43.95,99.8 45.42,98.33 *4.38
Net*4_40: *4.40 J4.2
NetC2_2: C2.2 D1.1 R4.1 R5.2
NetC3_1: C3.1 U1.30 Y1.1
NetC4_2: C4.2 U1.29 Y1.2
NetC5_1: C5.1 U1.40 Y2.1
NetC6_2: C6.2 U1.39 Y2.2
NetC16_1: C16.1 U1.10
NetJ1_6: J1.6 R3.1
NetJ2_6: J2.6 R2.1
NetJ4_6: J4.6 R1.1
NetP1_1: P1.1 R5.1 U1.7
NetP1_4: P1.4 U1.42
NetP1_5: P1.5 U1.37
NetR1_2: R1.2 U1.3
NetR2_2: R2.2 U1.58
NetR3_2: R3.2 U1.8
NetR6_1: R6.1 U1.24
NetR7_1: R7.1 U1.23
NetR18_2: R18.2 U1.53
VCC: *1.16 *3.16 *4.16 C20.1 C21.1 C22.1 C23.1 C24.1 D1.2 J1.7 J2.7 J4.7 L1.1 P1.2 R4.2 R13.2 R19.1 R24.2 R26.1 R32.2 R33.1 U1.18 U1.19 U1.26 U1.38 U1.48 U1.49 U1.54 U1.57 U2.4
pads on no net: *1.7 *1.8 *1.17 *1.29 *1.30 *1.39 *2.4 *2.5 *2.15 *2.16 *3.7 *3.8 *3.17 *3.29 *3.30 *3.39 *4.7 *4.8 *4.17 *4.29 *4.30 *4.39 D1.3 J1.8 J1.9 J2.8 J2.9 J4.8 J4.9 P1.6 U1.11 U1.12 U1.13 U1.14 U1.21 U1.22 U1.27 U1.28 U1.34 U1.35 U1.36 U1.43 U1.44

## Text inside footprints (layer, text, board x,y; h text height)
C1: Top Overlay "+" at 66.632,36.763 h1.5
C20: Top Overlay "+" at 104.5,41.95 h1.5 r90
J1: Top Overlay "6" at 121.245,122.045 h1.5; Top Overlay "9" at 129.555,122.045 h1.5; Top Overlay "5" at 130.94,112.645 h1.5; Top Overlay "1" at 120.11,112.645 h1.5
J2: Top Overlay "6" at 83.845,122.045 h1.5; Top Overlay "9" at 92.155,122.045 h1.5; Top Overlay "5" at 93.54,112.645 h1.5; Top Overlay "1" at 82.71,112.645 h1.5
J3: Top Overlay "6" at 93.155,30.055 h1.5 r180; Top Overlay "9" at 84.845,30.055 h1.5 r180; Top Overlay "5" at 83.46,39.455 h1.5 r180; Top Overlay "1" at 94.29,39.455 h1.5 r180
J4: Top Overlay "6" at 46.245,122.045 h1.5; Top Overlay "9" at 54.555,122.045 h1.5; Top Overlay "5" at 55.94,112.645 h1.5; Top Overlay "1" at 45.11,112.645 h1.5